# Altium PCB Power_board.PcbDoc
Units mm, origin at the board's own origin, x right, y up, seen from the top; angles counter-clockwise.
Board outline 41.5 x 11.45 mm, 2 copper layers (Top Layer, Bottom Layer); 25 components, 14 nets, 73 pads, 20 vias.
Unrouted connection lines stored in the file: 2.
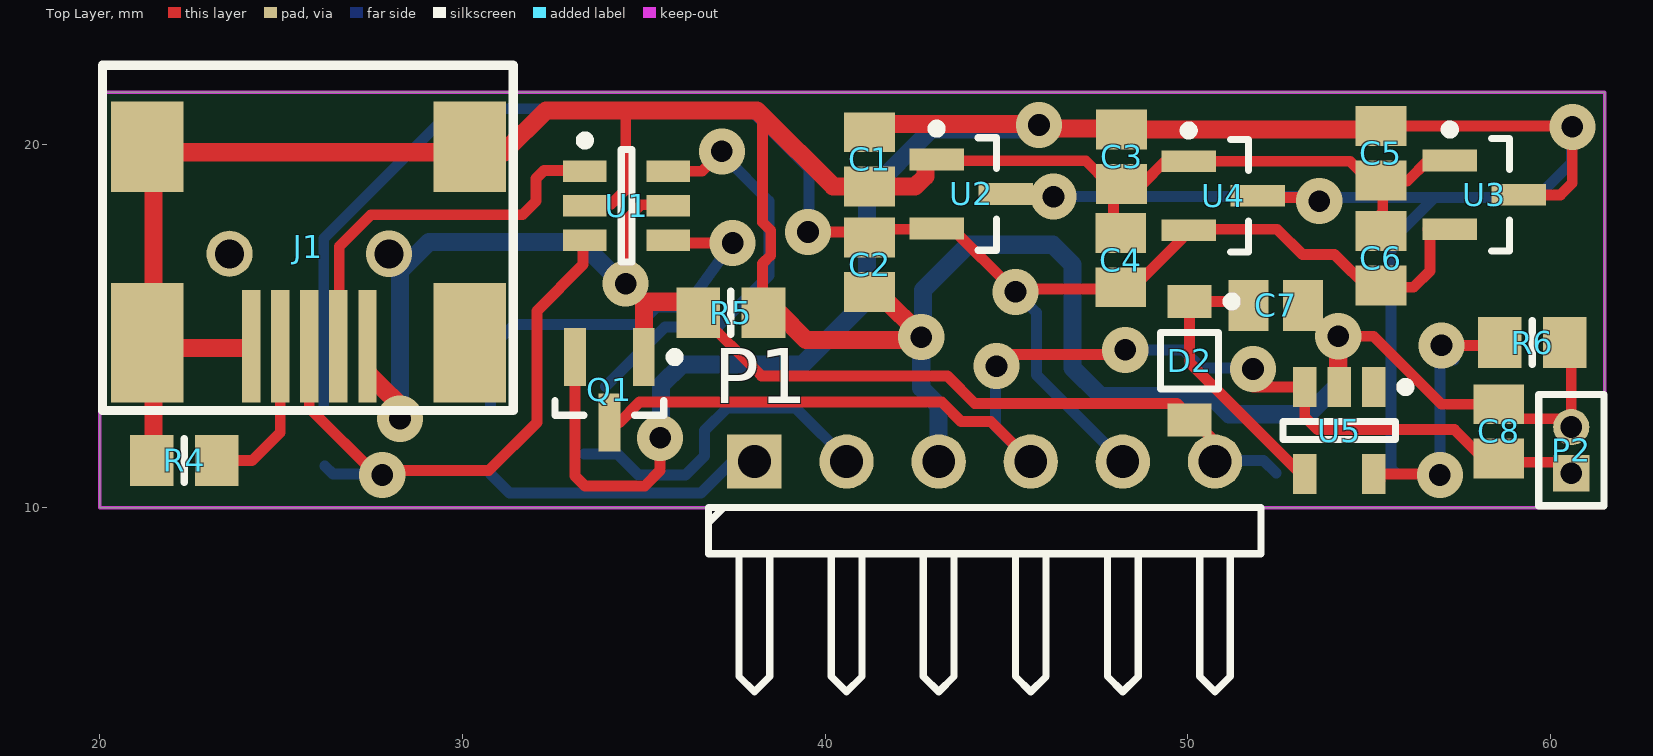
[diagram p0: Top Layer view]
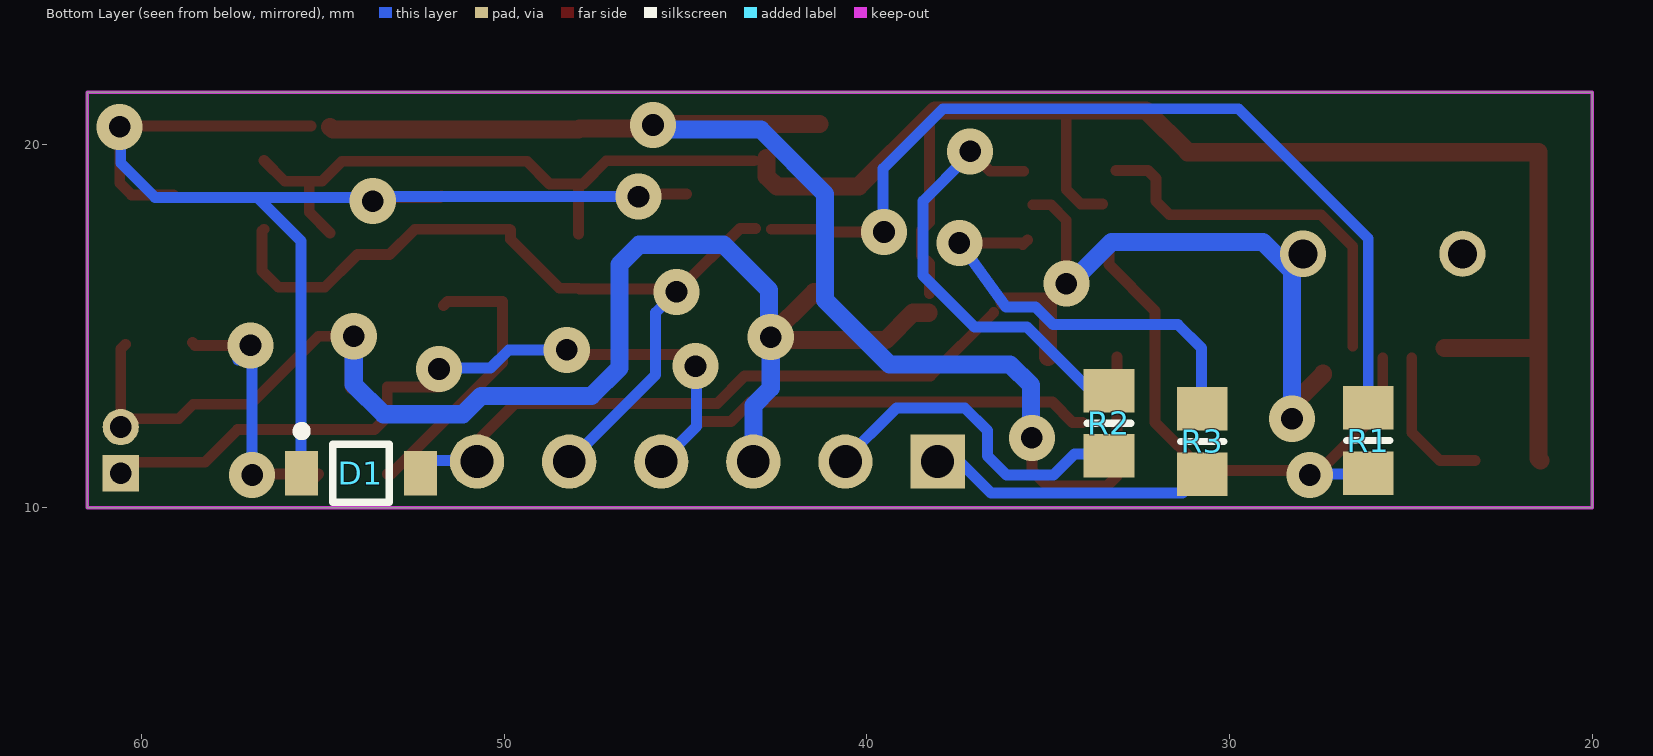
[diagram p1: Bottom Layer view, seen from below]

## Layer stack, top to bottom
Top Solder: solder mask 0.0102, Solder Resist, Dk 3.5
Top Layer: signal copper 0.0356
Dielectric 1: dielectric 0.32, FR-4, Dk 4.8
Bottom Layer: signal copper 0.0356
Bottom Solder: solder mask 0.0102, Solder Resist, Dk 3.5

## Board outline
20,10 61.5,10 61.5,21.45 20,21.45

## Design rules (kind name [scope] priority, off if disabled: settings)
Clearance [All] p1: gap=0.2
Clearance Clearance_1 [IsBoardOutline] p2: gap=0.01
FabricationTestPointUsage [All] p1 off: valid=0 allowmultiple=FALSE
FabricationTestpoint [All] p1 off: side=3 testpointundercomponent=TRUE minsize=1.016 maxsize=2.54 preferedsize=1.524 minholesize=0 maxholesize=1.016 preferedholesize=0.813 testpointgrid=0.025 allowsidetop=TRUE allowsidebottom=TRUE usegrid=TRUE gridtolerance=0
PolygonConnect [All] p1: connectstyle=Relief reliefconductorwidth=0.254 reliefentries=4 polygonreliefangle="90 Angle" airgapwidth=0.254
RoutingVias [All] p1: holewidth=0.711 width=1.27 viastyle="Through Hole" minholewidth=0.711 minwidth=1.27 maxholewidth=0.711 maxwidth=1.27
SolderMaskExpansion [All] p1: expansion=0.102
Width [All] p1: maxlimit=0.5 minlimit=0.3 preferedwidth=0.3
27 further rules are at their usual default settings.

## Components (designator, comment, footprint, x,y, rotation, side; value= is the part's Value field where it differs from the comment)
C1 "1uF" C0805 41.225,19.6 r90 top
C2 "1uF" C0805 41.225,16.7 r90 top
C3 "1uF" C0805 48.175,19.675 r90 top
C4 "1uF" C0805 48.15,16.825 r270 top
C5 "1uF" C0805 55.325,19.775 r90 top
C6 "1uF" C0805 55.325,16.875 r270 top
C7 "1uF" C0805 52.425,15.575 r180 top
C8 "1uF" C0805 58.575,12.1 r270 top
D1 "MBR0520LT1G" ONSC-SOD-123-2-425-04_V 53.95,10.95 r180 bottom
D2 "MBR0520LT1G" ONSC-SOD-123-2-425-04_V 50.05,14.05 r270 top
J1 "Mini usb_B" ? 21.3,19.95 r270 top
P1 "Header 6H" HDR1X6H 38.05,11.27 r0 top
P2 "MHDR1X2" MHDR1X2 60.575,10.95 r90 top
Q1 "IRLML6402" SOT95P237X112-3N 34.05,13.25 r270 top
R1 "1.5K" 6-0805_N 26.175,11.85 r90 bottom
R2 "22R" 6-0805_N 33.325,12.325 r270 bottom
R3 "22R" 6-0805_N 30.75,11.825 r270 bottom
R4 "100K" 6-0805_N 22.325,11.3 r0 top
R5 "10K" 6-0805_N 37.4,15.375 r180 top
R6 "3K" 6-0805_N 59.5,14.55 r180 top
U1 "USBLC6-2SC6" USBLC6-2SC6 34.525,18.325 r0 top
U2 "MCP1700T-3302E/TT" SOT-23-TT3_N 44.025,18.65 r0 top
U3 "MCP1700T-3302E/TT" SOT-23-TT3_N 58.175,18.625 r0 top
U4 "MCP1700T-3302E/TT" SOT-23-TT3_N 50.975,18.6 r0 top
U5 "MCP73831T-2ATI/OT" SOT-23-OT5_N 54.175,12.125 r270 top

## Footprints (in the part's own frame and the unit in brackets; to place one, negate y for a bottom-side part, rotate by r counter-clockwise, add the part's x,y. Pads: shape width x height; smd on the part's side, far side on the other; paste and mask are expansions set on the pad)
6-0805_N [mm] "Chip Resistor, Body 2.0x1.2mm, IPC Medium Density"
  rect 1.2x1.4 smd: 1(-0.9,0) 2(0.9,0)
  silkscreen extent 0,-0.6 0,0.6, body extent -1.07,-0.7 1.07,0.7, height 0.7
C0805 [mm]
  rect 1.1x1.4 smd: 1(-0.75,0) 2(0.75,0)
  body extent -1.1,-0.72 1.1,0.72, height 1.4
HDR1X6H [mm] "Connector; Header; 6 Position; Right Angle"
  rect 1.5x1.5 hole 0.9: 1(0,0)
  round 1.5 hole 0.9: 2(2.54,0) 3(5.08,0) 4(7.62,0) 5(10.16,0) 6(12.7,0)
  silkscreen extent -1.27,-6.35 13.97,-1.27
MHDR1X2 [mm] "Connector; Header; 2 Position"
  rect 1x1 hole 0.6: 1(0,0)
  round 1 hole 0.6: 2(1.27,0)
  silkscreen extent -0.9,-0.9 2.17,0.9
ONSC-SOD-123-2-425-04_V [mm] "SOD, 2-Leads, Body 2.69x1.6mm"
  rect 0.91x1.22 smd: 1(-1.635,0) 2(1.635,0)
  silkscreen extent -1.76,-0.8 0.78,1.28, body extent -1.35,-0.8 1.35,0.8, height 1.35
SOT95P237X112-3N [mm] "SOT23, 3-Leads, Body 2.92x2.37mm, Pitch 0.95mm, IPC Medium Density"
  rect 1.6x0.6 smd: 1(-0.9,0.95) 2(0.9,0) 3(-0.9,-0.95)
  silkscreen extent -1.02,-1.5 0.7,1.93, body extent -0.7,-1.52 0.7,1.52, height 1.12
SOT-23-OT5_N [mm] "SOT23, 5-Leads, Body 2.9x1.6mm, Pitch 0.95mm, Lead Span 2.7mm, IPC Medium Density"
  rect 1.1x0.65 smd: 1(-1.2,0.95) 2(-1.2,0) 3(-1.2,-0.95) 4(1.2,-0.95) 5(1.2,0.95)
  silkscreen extent -1.32,-1.55 0.25,1.95, body extent -0.9,-1.55 0.9,1.55, height 1.45
SOT-23-TT3_N [mm] "SOT23, 3-Leads, Body 2.9x1.3mm, Pitch 0.95mm, Lead Span 2.4mm, IPC Medium Density"
  rect 1.5x0.6 smd: 1(-0.95,0.95) 2(-0.95,-0.95) 3(0.95,0)
  silkscreen extent -1.07,-1.55 0.7,1.92, body extent -0.7,-1.52 0.7,1.53, height 1.12
USBLC6-2SC6 [mm] "SOT23, 6-Leads, Body 2.92x2.80mm, Pitch 0.95mm, IPC Low Density"
  rect 1.2x0.6 smd: 1(-1.15,0.95) 2(-1.15,0) 3(-1.15,-0.95) 4(1.15,-0.95) 5(1.15,0) 6(1.15,0.95)
  silkscreen extent -1.27,-1.55 0.15,1.92, body extent -0.87,-1.52 0.87,1.53, height 1.45
? [mm]
  rect 3.1x0.5 smd: 1(5.5,6.075) 2(5.5,5.275) 3(5.5,4.475) 4(5.5,3.675) 5(5.5,2.875)
  round 1.27 hole 0.8: 2(2.95,2.275)
  rect 2.5x2 smd: GND(0,8.9) GND(0,0)
  rect 3.3x2 smd: GND(5.4,8.9) GND(5.4,0)
  silkscreen extent -2.25,-1.22 7.27,10.1

## Part data
C1 C2 C3 C4 C5 C6 C7 C8: library part Cap, "Capacitor"
D1 D2: "Schottky Power Rectifier, 2-Pin SOD-123, Pb-Free, Tape and Reel"
P1: "Header, 6-Pin, Right Angle"
P2: "Header, 2-Pin"
R1 R2 R3 R4 R5 R6: library part Res2, "Resistor"
U2 U3 U4: "Low Quiescent Current LDO, 3-Pin SOT-23, Extended Temperature, Tape and Reel"
U5: "Miniature Single-Cell, Fully Integrated Li-Ion, Li-Polymer Charge Management Controller, 4.2V, 5-Pin SOT-23, Industrial Temperature, Tape and Reel"

## Via types
v1: diameter 1.27, hole 0.6, Top Layer to Bottom Layer, 19 vias
v2: diameter 1.27, hole 0.8, Top Layer to Bottom Layer, 1 vias

## Nets (pads, with @x,y where several pads share a name; then routed paths per layer and width w, separated by ;. In a path a pad name is that pad's centre, name@x,y a point inside that pad or via, vN(x,y) a via of type N, cw(c..) or ccw(c..) an arc to the next point about the centre after c; other vN are vias at no path point)
"BAT +": C8.2 P1.4 P2.1 Q1.2 U5.3 | length 34
  Top Layer w0.3: Q1.2 34.325,12.35 34.885,12.91 43.215,12.91 43.75,12.375 44.565,12.375 P1.4 ; v1@44.545,13.86 44.91,14.225 48.15,14.225 v1(48.275,14.35) ; v1(51.8,13.825) 51.8,13.325 U5.3 53.225,12.5 53.575,12.15 57.35,12.15 58.25,11.25 60.275,11.25 P2.1
  Bottom Layer w0.3: v1@44.545,13.86 44.7,13.705 44.7,12.24 P1.4 ; v1(48.275,14.35) 49.875,14.35 50.375,13.85 51.775,13.85 v1(51.8,13.825)
  other v1: 44.725,13.9
GND: C1.1 C2.1 C3.1 C4.1 C5.1 C6.1 C7.1 C8.1 J1.5 J1.GND P1.3 P2.2 R4.1 R5.1 R6.1 U1.2 U2.1 U3.1 U4.1 U5.2 | length 100.5
  Top Layer w0.3: U1.2@33.5,18.375 34.1,18.375 34.5,18.775 34.5,20.8 34.3,21 ; R5.1@38.275,15.9 38.275,16.732 38.5,16.957 38.5,17.643 38.275,17.868 38.275,20.8 ; U2.1@43.11,19.565 47.185,19.565 47.825,18.925 C3.1@47.95,18.925 ; C4.1@47.95,17.55 C3.1@47.95,18.925 ; v1(54.15,14.725) 55.125,14.725 57,12.85 C8.1 58.975,12.45 60.345,12.45 P2.2 ; C6.1@54.8,17.575 55.375,18.15 C5.1@55.375,19 ; U3.1@56.625,19.575 56.05,19 55.025,19 54.475,19.55 49.375,19.55 48.75,18.925 C3.1@47.95,18.925 ; P2.2@60.445,12.35 P2.2 ; R6.1@60.445,14.505 60.575,14.375 P2.2
  Top Layer w0.5: R4.1 21.475,11.35 J1.GND@21.475,14.4 ; J1.5@24.075,14.4 J1.GND@21.475,14.4 ; R5.1 38.725,15.375 39.475,14.625 42.775,14.625 41.45,15.95 C2.1 ; C2.1@41.225,15.803 C2.1@41.225,15.9 ; U2.1@42.762,19.637 42.762,19.137 42.475,18.85 C1.1 40.225,18.85 38.275,20.8 38.125,20.95 32.3,20.95 31.15,19.8 21.475,19.8 J1.GND@21.475,14.4 ; U5.2@54.15,13.35 v1(54.15,14.725)
  Bottom Layer w0.5: v1@42.65,14.625 42.7,14.675 42.7,16 43.95,17.25 46.275,17.25 46.825,16.7 46.825,13.85 47.6,13.075 50.642,13.075 51.142,12.575 53.325,12.575 54.15,13.4 v1@54.15,14.175 ; v1(42.65,14.7) 42.65,13.3 43.13,12.82 P1.3
NetC1_2: C1.2 C3.2 C5.2 D1.1 Q1.3 U2.3 U3.3 U4.3 | length 75.7
  Top Layer w0.3: Q1.3 33.1,10.875 33.375,10.6 35.025,10.6 35.45,11.025 v1(35.45,11.925) v1@35.425,11.95 ; U2.3 46.174,18.65 46.525,18.299 v1@46.402,18.176 ; U4.3@51.725,18.6 51.775,18.55 53.377,18.55 v1@53.427,18.6 ; C5.2@54.8,20.5 C5.2@54.821,20.479 ; C5.2 v1@60.472,20.525 ; U3.3 60.275,18.625 60.603,18.953 v1(60.603,20.501) 60.579,20.525 v1@60.472,20.525 ; v1@60.704,20.604 60.582,20.563 v1@60.472,20.525
  Top Layer w0.5: C1.2@41.302,20.577 v1@45.675,20.577 ; v1@45.675,20.45 47.925,20.45 47.95,20.425 54.725,20.425 C5.2@54.8,20.5
  Bottom Layer w0.3: v1@46.402,18.176 46.801,18.575 53.178,18.575 53.178,18.353 53.375,18.55 59.625,18.55 ; D1.1@55.71,10.975 55.6,11.085 55.6,17.35 56.8,18.55 59.625,18.55 ; v1(60.603,20.501) 60.575,20.473 60.575,19.5 59.625,18.55
  Bottom Layer w0.5: v1@35.4,12.3 35.475,12.375 35.475,13.375 36.05,13.95 39.375,13.95 41.15,15.725 41.15,18.65 42.926,20.426 v1@45.675,20.426
  other v1: 53.625,18.45 46.3,18.575 45.9,20.55
NetC7_2: C7.2 D2.1 U5.4 | length 7.8
  Top Layer w0.3: C7.2 51.565,15.685 D2.1 50.05,14 53.125,10.925 U5.4
NetJ1_2: J1.2 U1.1 | length 10.5
  Top Layer w0.3: J1.2@26.6,14.45 26.6,17.2 27.475,18.075 31.65,18.075 32.025,18.45 32.025,19.075 32.25,19.3 U1.1@33.125,19.3
NetJ1_3: J1.3 R1.1 U1.3 | length 16.7
  Top Layer w0.3: J1.3@25.775,14.125 25.775,12.75 v1@27.67,10.855 ; v1@27.831,11.016 27.831,10.856 27.661,11.025 30.725,11.025 32.05,12.35 32.05,15.425 33.325,16.7 U1.3@33.325,17.35
  Bottom Layer w0.3: R1.1@26.2,11.15 26.425,10.925 27.74,10.925 v1@27.831,11.016
  other v1: 27.786,10.9
NetJ1_4: J1.4 R4.2 | length 4.1
  Top Layer w0.3: R4.2 24.2,11.3 24.975,12.075 J1.4@24.975,14.125
NetR2_1: R2.1 U1.6 | length 11.4
  Top Layer w0.3: U1.6 36.6,19.275 v1(37.15,19.825) ; v1@37.3,19.9 v1@37.4,19.9
  Bottom Layer w0.3: R2.1@33.939,13.339 35.579,14.979 37.029,14.979 38.45,16.4 38.45,18.45 37.25,19.65 v1@37.15,19.65
NetR3_1: R3.1 U1.4 | length 11.6
  Top Layer w0.3: U1.4@35.575,17.375 35.7,17.25 35.7,17.3 v1(37.45,17.3)
  Bottom Layer w0.3: R3.1@30.775,12.85 30.775,14.4 31.425,15.05 34.867,15.05 35.35,15.533 36.158,15.533 v1(37.45,17.3)
NetR6_2: R6.2 U5.5 | length 8
  Top Layer w0.3: U5.5@55.3,10.75 U5.5 56.975,10.925 56.975,10.948 57.003,10.976 v1@57.078,10.901 ; v1@57,14.418 v1(57,14.475) 58.525,14.475 R6.2
  Bottom Layer w0.3: v1(57,14.475) 57,14.418 57.343,14.075 57.15,14.075 56.95,13.875 56.95,11.028 v1@57.078,10.9
  other v1: 56.95,10.9
USB_DM: P1.2 R2.2 | length 9.3
  Bottom Layer w0.3: R2.2@33.35,11.475 34.275,11.475 34.85,10.9 36.15,10.9 36.675,11.425 36.675,12.125 37.3,12.75 39.185,12.75 P1.2@40.665,11.27
USB_DP: P1.1 R3.2 | length 8.8
  Top Layer w0.3: P1.1@38.125,10.975 37.83,11.27 P1.1@38.125,11.27
  Bottom Layer w0.3: R3.2@30.775,11.05 30.775,10.925 31.3,10.4 36.575,10.4 37.445,11.27 P1.1@38.125,11.27
VCC_USB: D1.2 D2.2 J1.1 P1.6 Q1.1 R5.2 U1.5 | length 36.4
  Top Layer w0.3: v1@34.5,16.425 34.5,17.925 34.925,18.35 U1.5@35.425,18.35 ; R5.2 38.25,13.625 43.375,13.625 44.125,12.875 48.161,12.875 49.7,12.875 50.75,11.825 P1.6
  Top Layer w0.5: J1.1@27.425,13.7 27.425,13.675 v1@28.574,12.526 ; Q1.1 35,15.675 R5.2@36.2,15.675
  Bottom Layer w0.3: P1.6 50.78,11.3 52.09,11.3 D1.2@52.44,10.95
  Bottom Layer w0.5: v1@28.574,12.526 28.275,12.526 28.275,16.525 29.075,17.325 33.25,17.325 34.4,16.175 v1(34.5,16.175)
  other v1: 28.275,12.45
  other v2: 27.975,17
VDD: C2.2 C4.2 C6.2 P1.5 R1.2 U2.2 U3.2 U4.2 | length 48.3
  Top Layer w0.3: v1@39.825,17.6 41.025,17.6 C2.2@41.225,17.4 ; C2.2@41.075,17.675 U2.2@42.625,17.675 ; U2.2 43.5,17.7 45.175,16.025 47.925,16.025 47.95,16.05 48.475,16.05 49.825,17.4 49.825,17.65 49.85,17.675 52.46,17.675 53.16,16.975 54.05,16.975 54.145,16.88 54.95,16.075 56.225,16.075 56.675,16.525 56.675,17.625 U3.2@56.625,17.675
  Bottom Layer w0.3: R1.2@26.175,12.85 26.175,17.425 29.75,21 37.9,21 39.55,19.35 39.55,17.625 v1(39.525,17.6) v1@39.825,17.6 ; v1(45.25,15.95) 45.825,15.375 45.825,13.655 P1.5
pads on no net: U5.1

## Keep-outs
Keep-Out Layer:
  the board outline again, w0.1